# Altium PCB ST25RU3993_RF_MODULE_STENCIL.PcbDoc (part 1 of 2)
Units mil, origin at the board's own origin, x right, y up, seen from the top; angles counter-clockwise.
Board outline 3350 x 3250 mil, 2 copper layers (Top Layer, Bottom Layer), stack 50.4 mil thick; 34 components, 107 nets, 218 pads, 38 vias.
Unrouted connection lines stored in the file: 49.
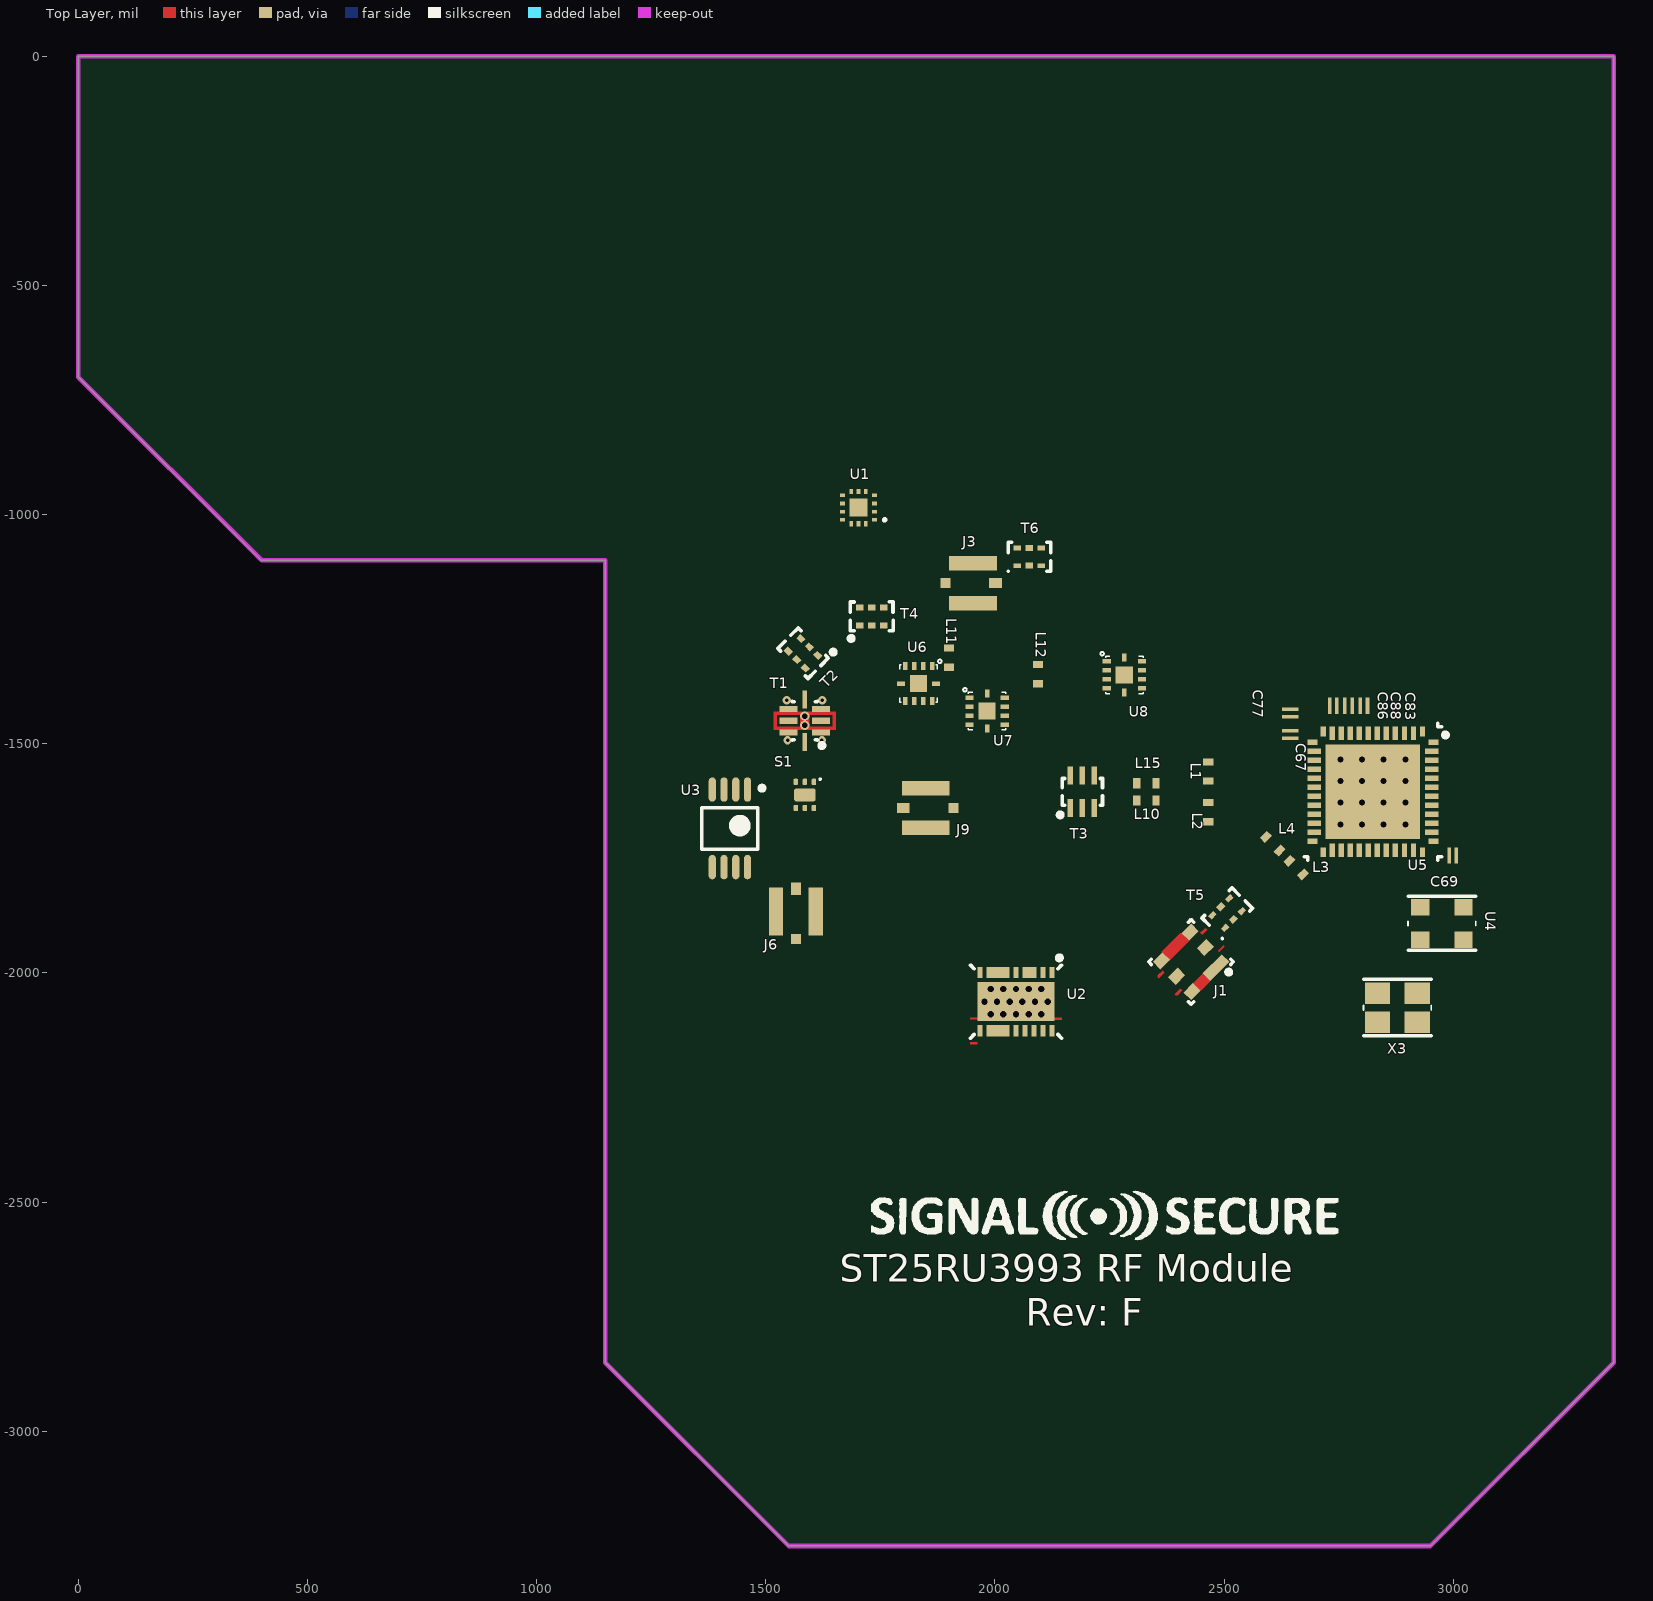
[diagram p0: Top Layer view]
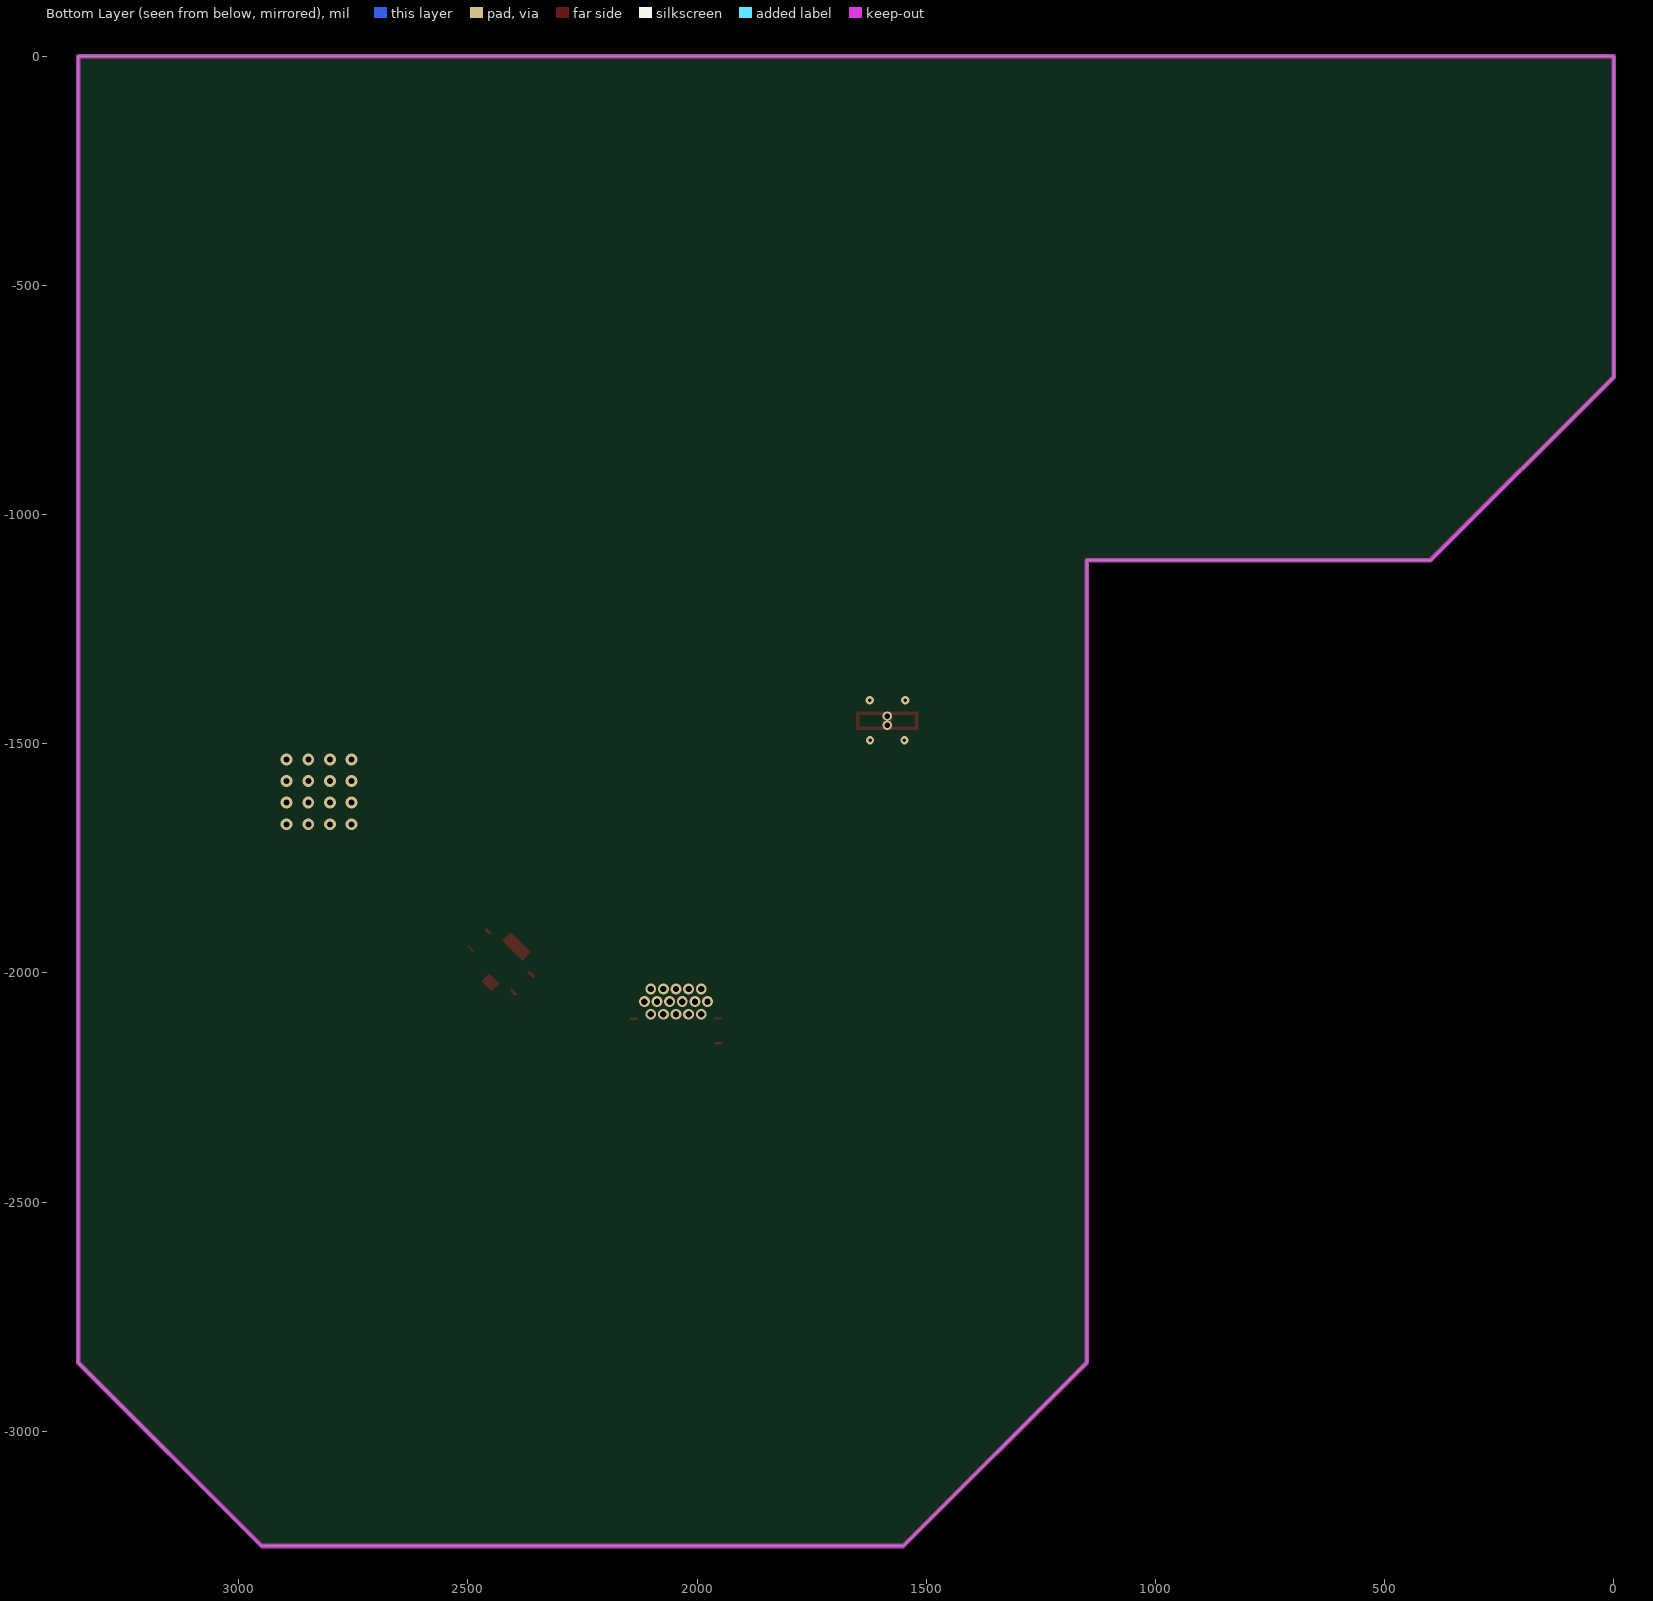
[diagram p1: Bottom Layer view, seen from below]

## Layer stack, top to bottom
Top Solder: solder mask 1, Solder Resist, Dk 4.5
Top Layer: signal copper 1.7
Dielectric2: core 47, FR408HR, Dk 3.69
Bottom Layer: signal copper 1.7
Bottom Solder: solder mask 1, Solder Resist, Dk 4.5

## Board outline
2950,-3250 3350,-2850 3350,0 0,0 0,-700 400,-1100 1150,-1100 1150,-2850 1550,-3250

## Design rules (kind name [scope] priority, off if disabled: settings)
AssemblyTestPointUsage [All] p1 off:
AssemblyTestpoint [All] p1 off: testpointundercomponent=TRUE minsize=40 maxsize=100 preferedsize=60 minholesize=0 maxholesize=40 preferedholesize=32 testpointgrid=1 usegrid=TRUE gridtolerance=0.01 allowsidetop=TRUE allowsidebottom=TRUE
Clearance Clearance_5 [IsTrack vs InComponent('1','2','3','4','5','6','7','8','9','10','11','12','13','14','15','16','17','18','19','20','21','22','23','24','25','26','27','28','29','30','31','32','33','34','35','36','37','38','39','40','41','42','43','44','45','46','47','48','49','50','51','52','53','54','55')] p1: gap=0 ignorepadtopadclearanceinfootprint=TRUE
Clearance [InNetClass('Differential_RF') and IsTrack or InNetClass('Differential_RF') and IsArc or InNetClass('Differential_RF') and IsPad or InNet('PAOUT_N')or InNet('PAOUT_P')or InNet('NetC5_2') or InNet('NetC4_2') or InNet('NetC7_2')or InNet('NetC6_1') vs InNamedPolygon('S')] p2: gap=31.5 ignorepadtopadclearanceinfootprint=FALSE except(0: Arc-Hole Track-Hole SMDPad-Hole THPad-Hole Via-Hole Fill-Hole Poly-Hole Region-Hole Text-Hole)
Clearance Clearance_3 [InNetClass('SE_CPWG') and IsTrack or InNetClass('SE_CPWG') and IsArc or InNetClass('SE_CPWG') and IsPad vs InNamedPolygon('S')] p3: gap=15.75 ignorepadtopadclearanceinfootprint=FALSE except(0: Arc-Hole Track-Hole SMDPad-Hole THPad-Hole Via-Hole Fill-Hole Poly-Hole Region-Hole Text-Hole)
Clearance Clearance_1 [InNet('NetT4_1') vs InNet('CPL_TN')] p4: gap=3.94 ignorepadtopadclearanceinfootprint=FALSE except(0: Arc-Hole Track-Hole SMDPad-Hole THPad-Hole Via-Hole Fill-Hole Poly-Hole Region-Hole Text-Hole)
Clearance Clearance_4 [InComponent('T4') or InComponent('U2') or InComponent('U3')] p5: gap=5 ignorepadtopadclearanceinfootprint=FALSE except(0: Arc-Hole Track-Hole SMDPad-Hole THPad-Hole Via-Hole Fill-Hole Poly-Hole Region-Hole Text-Hole)
Clearance Clearance_2 [All] p6: gap=5 ignorepadtopadclearanceinfootprint=TRUE except(0: Arc-Hole Track-Hole SMDPad-Hole THPad-Hole Via-Hole Fill-Hole Poly-Hole Region-Hole Text-Hole; 7: Via-Poly; 10: Arc-Poly Track-Poly SMDPad-Poly THPad-Poly Fill-Poly Poly-Poly)
ComponentClearance ComponentClearance_2 [InComponent('SHIELD1')] p1: gap=0 collisioncheckmode=3 verticalgap=0 showdistances=FALSE
ComponentClearance [All] p2: gap=10 collisioncheckmode=3 verticalgap=10 showdistances=TRUE
DiffPairsRouting [InNetClass('PAOUT')] p1: maxlimit=5 minlimit=5 mostfreqgap=5 toplayer_minwidth=32.1 toplayer_maxwidth=32.1 toplayer_prefwidth=128.32 bottomlayer_minwidth=32.1 bottomlayer_maxwidth=32.1 bottomlayer_prefwidth=128.32 impedanceprofiledriven=TRUE impedanceprofileid={03FC9658-CDFA-40E1-9851-20E2EF889013} impedanceprofilevalue=50.000000 maxuncoupledlength=500
DiffPairsRouting DiffPairsRouting_RF [InNetClass('Differential_RF')] p2: maxlimit=15 minlimit=15 mostfreqgap=15 toplayer_minwidth=12.08 toplayer_maxwidth=12.08 toplayer_prefwidth=38.44 bottomlayer_minwidth=12.08 bottomlayer_maxwidth=12.08 bottomlayer_prefwidth=38.44 impedanceprofiledriven=TRUE impedanceprofileid={1FACFACD-6859-4A94-B60A-4F717C3D1123} impedanceprofilevalue=100.000000 maxuncoupledlength=0
FabricationTestPointUsage [All] p1 off: valid=0 allowmultiple=FALSE
FabricationTestpoint [All] p1 off: side=3 testpointundercomponent=TRUE minsize=40 maxsize=100 preferedsize=60 minholesize=0 maxholesize=40 preferedholesize=32 testpointgrid=1 allowsidetop=TRUE allowsidebottom=TRUE usegrid=TRUE gridtolerance=0.01
HoleSize FabricationTestpoint_1 [All] p1 off: absolutevalues=TRUE maxlimit=100 minlimit=1 maxpercent=80.000 minpercent=20.000
HoleSize FabricationTestPointUsage_1 [All] p2 off: absolutevalues=TRUE maxlimit=100 minlimit=1 maxpercent=80.000 minpercent=20.000
HoleSize [All] p3: absolutevalues=TRUE maxlimit=393.7 minlimit=5.91 maxpercent=80.000 minpercent=20.000
HoleToHoleClearance [ViaDiameter = 0.3] p1: gap=3.94 allowstackedmicrovias=TRUE
HoleToHoleClearance HoleToHoleClearance_1 [All] p2: gap=7.87 allowstackedmicrovias=TRUE
MatchedLengths [InNet('NetP1_2') or InNet('NetP2_2')] p1: tolerance=393.7 checknetsindiffpair=FALSE checkdiffpairvsdiffpair=TRUE checkxsignals=TRUE checkothers=TRUE
MinimumSolderMaskSliver [All] p1: minsoldermaskwidth=1.77
PlaneClearance [All] p1: clearance=19.68
PlaneConnect [All] p1: planeconnectstyle=Direct reliefexpansion=15.75 reliefentries=4 reliefconductorwidth=5.91 reliefairgap=5.91
PolygonConnect PolygonConnect_1 [InNet('GND')or InNet('MOD_BPLUS')or InNet('VPA')or InNet('VSUP')or InNet('5V') or InNet('NetC45_3') or InNet('NetC49_3')or InNet('VBUS')or InNet('NetP1_1') or InNet('NetC23_1')  or InNet('3V3')  or InNet('NetP1_5') or InNet('6V')] p1: connectstyle=Direct reliefconductorwidth=10 reliefentries=4 polygonreliefangle="90 Angle" airgapwidth=10
PolygonConnect [All] p2: connectstyle=Direct reliefconductorwidth=5.91 reliefentries=4 polygonreliefangle="90 Angle" airgapwidth=10
RoutingCorners [All] p1: cornerstyle=45-Degree minsetback=49.21 maxsetback=49.21
RoutingVias [All] p1: holewidth=7.87 width=23.62 viastyle="Through Hole" minholewidth=7.87 minwidth=7.87 maxholewidth=393.7 maxwidth=787.4
ShortCircuit ShortCircuit_1 [InComponent('B1')] p1: allowed=TRUE
ShortCircuit [All] p2: allowed=FALSE
SilkToSilkClearance [All] p1: silktosilkclearance=2
SilkToSolderMaskClearance [IsPad] p1: minsilkscreentomaskgap=0.2 clearancetoexposedcopper=TRUE
SolderMaskExpansion [All] p1: expansion=2.95 istentingtop=FALSE
Width Width_1 [InNetClass('SE_CPWG')] p1: maxlimit=16.22 minlimit=16.22 preferedwidth=101.52 impedanceprofiledriven=TRUE impedanceprofileid={BA523BF8-DAAF-41FE-A3D9-FB1800768F6D} impedanceprofilevalue=50.000000 minimp=50.000000 maximp=50.000000 favimp=50.000000
Width [All] p2: maxlimit=393.7 minlimit=5 preferedwidth=10 minimp=50.000000 maximp=50.000000 favimp=50.000000
15 further rules are at their usual default settings.

## Classes and differential pairs
net class PAOUT: NetC6_1 NetC7_2 PAOUT_N PAOUT_P
component class System_Overview_HP: H1 Shield2
net class Differential_RF: IN_N IN_P RFO_N RFO_P RX_N RX_P TX_N TX_P
component class "UHF RFID Reader": C67 C69 C77 C83 C86 C88 J9 L1 L2 L3 L4 L10 L15 T3 Title_Block_Antenna6 U4 U5 X3
component class "Power Amplifier": J1 J6 S1 T2 Title_Block_Antenna4 U2 U3
component class "Carrier Cancellation": J3 Title_Block_Antenna7 U6 U7 U8
net class SE_CPWG: LP_Filter_IN LP_Filter_OUT NetANT1_IN NetANT2_IN NetANT3_IN NetANT4_IN NetANT5_IN NetANT6_IN NetC32_1 NetC32_2 NetC37_1 NetC37_2 NetC107_1 NetC107_2 NetC108_1 NetC108_2 NetC109_1 NetC112_1 NetC112_2 NetJ1_IN NetJ1_OUT NetJ3_IN NetJ3_OUT NetL12_2 NetR22_2 NetR23_2 NetR24_2 NetT2_1 PA_OUT
component class "Antenna Switch": Title_Block_Antenna7 U1
differential pair PAOUT: +PAOUT_P -PAOUT_N
differential pair TX: +TX_P -TX_N
differential pair RX: +RX_P -RX_N
differential pair IN: +IN_P -IN_N
differential pair RFO: +RFO_P -RFO_N

## Components (designator, comment, footprint, x,y, rotation, side; value= is the part's Value field where it differs from the comment)
C67 "100nF" C0402-LLL 2644.34,-1479.77 r90 top locked
C69 "100nF" C0402-LLL 2998.67,-1743.55 r0 top locked
C77 "100nF" C0402-LLL 2644,-1432.87 r90 top locked
C83 "100nF" C0402-LLL 2804.77,-1416.78 r0 top locked
C86 "100nF" C0402-LLL 2737.84,-1416.78 r180 top locked
C88 "100nF" C0402-LLL 2771.31,-1416.78 r180 top locked
J1 "COAX JACK" MS-156HF_SAW 2427.8,-1975.83 r135 top locked
J3 "COAX JACK" MS-156HF 1952,-1149.69 r270 top locked
J6 "COAX JACK" MS-156HF 1565.6,-1865.6 r0 top locked
J9 "COAX JACK" MS-156HF 1849.06,-1640.2 r90 top locked
L1 "30nH" L0402-RF 2465.2,-1560.48 r90 top locked
L2 "30nH" L0402-RF 2465.2,-1649.06 r90 top locked
L3 "30nH" L0402-RF 2657.13,-1770.13 r135 top locked
L4 "30nH" L0402-RF 2605.95,-1717.96 r135 top locked
L10 "3n6H" L0402-RF 2330.36,-1623.47 r0 top locked
L11 "6n8H" L0402-RF 1899.26,-1312.28 r270 top locked
L12 "6n2H" L0402-RF 2094.14,-1348.06 r90 top locked
L15 "3n6H" L0402-RF 2330.36,-1586.07 r180 top locked
S1 "SP2T" SKY13431-374LF 1585.28,-1611.66 r270 top locked
T1 "LOWPASS FILTER" JTI-0900LP15B0063 1585,-1449.74 r90 top locked
T2 "20 dB Dir Coupler" DC0710J5010AHF 1581.35,-1302.61 r225 top locked
T3 "Balun" JTI-0900BL15C050 2190.6,-1604.77 r90 top locked
T4 "10dB Dir Coupler" DC0710J5010AHF 1731,-1222 r90 top locked
T5 "BD0810J50100A00" BD0810J50100AHF 2506.54,-1869.54 r135 top locked
T6 "BD0810J50100A00" BD0810J50100AHF 2075,-1092 r90 top locked
U1 "SKY13416-485LF" SKY13416485LF 1702.25,-984.76 r180 top locked
U2 "TQP9107" TQP9107 2045.91,-2062.45 r0 top locked
U3 "Log Detect" MAX4003 1421.74,-1684.5 r270 top locked
U4 "TCXO 20.000MHZ" "3.2 X 2.5 MM SMD" 2975.05,-1892.15 r180 top locked
U5 "ST25RU3993" ST25RU3993_QFN48_0.5mm_pitch 2824.46,-1604.77 r270 top locked
U6 "PE64906B-Z" PE62304 1833.32,-1368.55 r270 top locked
U7 "PE64906B-Z" PE62304 1982.92,-1428.59 r0 top locked
U8 "PE64906B-Z" PE62304 2282.13,-1349.85 r0 top locked
X3 "20 MHZ" NX3225SA 2878,-2076 r180 top locked

## Footprints (in the part's own frame and the unit in brackets; to place one, negate y for a bottom-side part, rotate by r counter-clockwise, add the part's x,y. Pads: shape width x height; smd on the part's side, far side on the other; paste and mask are expansions set on the pad)
"3.2 X 2.5 MM SMD" [mm] "Temperature Compensated Crystal Oscillator"
  rect 1x0.9 smd paste+0 mask+0: 1(-1.2,-0.9) 2(1.2,-0.9) 3(1.2,0.9) 4(-1.2,0.9)
  silkscreen extent -1.88,-1.51 1.88,1.48, body extent -1.65,-1.33 1.65,1.3, height 0.7
BD0810J50100AHF [mm] "RF Balun 800MHz ~ 1GHz 50 / 100 Ohm 0805"
  rect 0.27x0.41 smd mask+0.04: 1(-0.495,0.66) 3(-0.495,-0.66) 4(0.495,-0.66) 6(0.495,0.66)
  rect 0.33x0.41 smd mask+0.04: 2(-0.495,0) 5(0.495,0)
  silkscreen extent -0.8,-1.19 0.8,1.18, body extent -0.65,-1.03 0.65,1.03, height 0.86
C0402-LLL [mm]
  rect 0.2x0.9 smd paste+0 mask+0: 1(-0.2,0) 2(0.2,0)
  body extent -0.26,-0.51 0.25,0.51, height 0.31
DC0710J5010AHF [mm] "Directional Coupler"
  rect 0.33x0.41 smd mask+0.04: 1(-0.495,0.66) 2(-0.495,0) 3(-0.495,-0.66) 4(0.495,-0.66) 5(0.495,0) 6(0.495,0.66)
  silkscreen extent -1.35,-1.19 0.8,1.26, body extent -0.65,-1.03 0.65,1.03, height 0.86
JTI-0900BL15C050 [mm] "900 MHz Balun 1:1"
  rect 1x0.3 smd mask+0.07: 1(-0.9,0.66) 2(-0.9,0) 3(-0.9,-0.65) 4(0.9,-0.65) 5(0.9,0) 6(0.9,0.66)
  silkscreen extent -1.4,-1.12 0.74,1.35, body extent -0.64,-1.02 0.65,1.02, height 0.86
JTI-0900LP15B0063 [mm] "900 MHz Low Pass Filter"
  rect 0.35x1 smd mask+0.05: 1(-0.65,-0.9) 2(0,-0.9) 3(0.65,-0.9) 5(0.65,0.9) 6(0,0.9) 7(-0.65,0.9)
  rect 1x0.27 smd mask+0.05: 4(1.175,0) 8(-1.175,0)
  Top Layer region: -0.511,-0.399 -0.511,1.4 -0.325,1.4 -0.325,0.25 0,0.25 0,-0.25 -0.325,-0.25 -0.325,-1.4 -0.511,-1.4
  Top Layer region: 0.51,0.399 0.51,-1.4 0.325,-1.4 0.325,-0.25 0,-0.25 0,0.25 0.325,0.25 0.325,1.4 0.51,1.4
  Top Layer region: -0.325,1.4 -0.325,1.55 0.325,1.55 0.325,1.4 0.51,1.4 0.51,1.725 -0.511,1.725 -0.511,1.4
  Top Layer region: 0.325,-1.4 0.325,-1.55 -0.325,-1.55 -0.325,-1.4 -0.51,-1.4 -0.51,-1.725 0.511,-1.725 0.511,-1.4
  silkscreen extent -1.5,-1.07 1.08,0.7, body extent -1.08,-0.7 1.08,0.7, height 0.96
L0402-RF [mil]
  rect 15.75x22 smd paste+0 mask+0: 1(-21,0) 2(21,0)
  body extent -22,-11 22,11, height 12
MAX4003 [mm] "µmax"
  oval 1.35x0.4 smd: 1(-2.15,0.975) 2(-2.15,0.325) 3(-2.15,-0.325) 4(-2.15,-0.975) 5(2.15,-0.975) 6(2.15,-0.325) 7(2.15,0.325) 8(2.15,0.975)
  silkscreen extent -2.35,-1.55 1.15,1.9, body extent -1.55,-1.55 1.55,1.55, height 1.1
MS-156HF [mm] "Subminiature Coaxial Switch"
  rect 0.8x2.65 smd paste+0 mask+0.051: G1(1.1,0) G2(-1.1,0)
  rect 0.55x0.55 smd paste-0.3 mask+0.051: IN(0,-1.525)
  rect 0.55x0.7 smd paste-0.3 mask+0.051: OUT(0,1.25)
  body extent -1.36,-1.35 1.34,1.35, height 1.56
MS-156HF_SAW [mm] "Coax swappable with SAW"
  rect 0.6x1.5 smd paste-0.065 mask+0.1: G1(-1.2,-0.75)
  rect 0.6x0.75 smd paste-0.065 mask+0.1: G1(-1.2,1.125) G2(1.2,-1.125) G2(1.2,1.125) IN(0,-1.125) OUT(0,1.125)
  silkscreen extent -2,-1.66 1.66,1.66, body extent -1.35,-1.35 1.35,1.35, height 1.56
NX3225SA [mm] "20 MHz Crystal Oscillator"
  rect 1.4x1.2 smd paste+0 mask+0: 1(-1.1,-0.8) 2(1.1,-0.8) 3(1.1,0.8) 4(-1.1,0.8)
  silkscreen extent -1.88,-1.58 1.88,1.55, body extent -1.65,-1.3 1.65,1.3, height 1.1
PE62304 [mm] "Digitally Tunable Capacitor for GSM/WCDMA"
  rect 0.45x0.25 smd mask+0.05: 1(-0.975,0.75) 2(-0.975,0.25) 3(-0.975,-0.25) 4(-0.975,-0.75) 6(0.975,-0.75) 7(0.975,-0.25) 8(0.975,0.25) 9(0.975,0.75)
  rect 0.25x0.45 smd mask+0.05: 5(0,-0.975) 10(0,0.975)
  rect 0.95x0.95 smd mask+0.05: 10(0,0)
  silkscreen extent -1.33,-1.04 1.04,1.28, body extent -1,-1.07 1,0.92, height 0.6
SKY13431-374LF [mm] "6 Pin DFN"
  rrect50% 0.35x0.25 smd mask+0.05: 1(-0.725,0.5) 2(-0.725,0) 3(-0.725,-0.5) 4(0.725,-0.5) 5(0.725,0) 6(0.725,0.5)
  rrect30% 0.7x1.2 smd mask+0.05: 7(0,0)
  silkscreen extent -0.92,0.8 -0.83,0.9, body extent -0.75,-0.75 0.75,0.75, height 0.5
SKY13416485LF [mm]
  rect 0.28x0.2 smd: 1(-0.895,0.675) 2(-0.895,0.225) 3(-0.895,-0.225) 4(-0.895,-0.675) 8(0.895,-0.675) 9(0.895,-0.225) 10(0.895,0.225) 11(0.895,0.675)
  rect 0.2x0.28 smd: 5(-0.4,-0.895) 6(0,-0.895) 7(0.4,-0.895) 12(0.4,0.895) 13(0,0.895) 14(-0.4,0.895)
  rect 1x1 smd: 15(0,0)
  silkscreen extent -1.5,0.63 -1.4,0.72, body extent -1.01,-1.01 1.01,1.01, height 0.7
ST25RU3993_QFN48_0.5mm_pitch [mm] "QFN, 48-Leads, Body 7,0x7,0mm (max), Pitch 0,50mm, IPC Medium Density"
  rect 0.55x0.3 smd paste+0 mask+0.05: 1(-3.35,2.75) 12(-3.35,-2.75) 25(3.35,-2.75) 36(3.35,2.75)
  rect 0.75x0.3 smd mask+0.05: 2(-3.25,2.25)
  rect 0.75x0.3 smd paste+0 mask+0.05: 3(-3.25,1.75) 4(-3.25,1.25) 5(-3.25,0.75) 6(-3.25,0.25) 7(-3.25,-0.25) 8(-3.25,-0.75) 9(-3.25,-1.25) 10(-3.25,-1.75) 11(-3.25,-2.25) 26(3.25,-2.25) 27(3.25,-1.75) 28(3.25,-1.25) 29(3.25,-0.75) 30(3.25,-0.25) 31(3.25,0.25) 32(3.25,0.75) 33(3.25,1.25) 34(3.25,1.75) 35(3.25,2.25)
  rect 0.3x0.55 smd paste+0 mask+0.05: 13(-2.75,-3.35) 24(2.75,-3.35) 37(2.75,3.35) 48(-2.75,3.35)
  rect 0.3x0.75 smd paste+0 mask+0.05: 14(-2.25,-3.25) 15(-1.75,-3.25) 16(-1.25,-3.25) 17(-0.75,-3.25) 18(-0.25,-3.25) 19(0.25,-3.25) 20(0.75,-3.25) 21(1.25,-3.25) 22(1.75,-3.25) 23(2.25,-3.25) 38(2.25,3.25) 39(1.75,3.25) 40(1.25,3.25) 41(0.75,3.25) 42(0.25,3.25) 43(-0.25,3.25) 44(-0.75,3.25) 45(-1.25,3.25) 46(-1.75,3.25) 47(-2.25,3.25)
  rect 5.24x5.24 smd mask+0.07: 49(0,0)
  silkscreen extent -3.8,-3.8 3.8,4.15, body extent -3.5,-3.5 3.5,3.5, height 1
TQP9107 [mm] "699 – 960 MHz 2-stage Power Amplifier"
  rect 0.27x0.62 smd mask+0.05: 1(2,1.62) 2(1.5,1.62) 4(0,1.62) 6(-2,1.62) 7(-2,-1.62) 9(0,-1.62) 10(0.5,-1.62) 11(1,-1.62) 12(1.5,-1.62) 13(2,-1.62)
  rect 0.77x0.62 smd mask+0.05: 3(0.75,1.62)
  rect 1.27x0.62 smd mask+0.05: 5(-1,1.62) 8(-1,-1.62)
  rect 4.28x2.16 smd mask+0.05: 14(0,0)
  silkscreen extent -2.53,-2.03 2.53,2.55, body extent -2.25,-1.75 2.25,1.75, height 0.85

## Part data
C67 C69 C77 C83 C86 C88: library part LLL153C80J104ME01E, "CAP CER 0.1UF 6.3V X6S 0204", Capacitance @ Frequency=-, Manufacturer="Murata Electronics North America", Operating Temperature="-55°C ~ 105°C", Package / Case="0204 (0510 Metric)", Power - Peak Pulse=500W, Power Line Protection=Yes, Supplier Device Package=8-SO, Supplier Part Number 1=490-4310-1-ND, Temperature Coefficient=X6S, Tolerance=±20%, Voltage - Breakdown (Min)=6V, Voltage - Rated=6.3V, Voltage - Reverse Standoff (Typ)=5.25V, Applications="Bypass, Decoupling", Category=Capacitors, ComponentLink1Description=http://www.murata.com/~/media/webrenewal/support/library/catalog/products/capacitor/mlcc/c02e.ashx, ComponentLink1URL=http://www.murata.com/~/media/webrenewal/support/library/catalog/products/capacitor/mlcc/c02e.ashx, ComponentLink2Description=http://www.st.com/content/ccc/resource/technical/document/datasheet/3e/ec/b2/54/b2/76/47/90/CD00001361.pdf/files/CD00001361.pdf/jcr:content/translations/en.CD00001361.pdf, ComponentLink2URL=http://www.st.com/content/ccc/resource/technical/document/datasheet/3e/ec/b2/54/b2/76/47/90/CD00001361.pdf/files/CD00001361.pdf/jcr:content/translations/en.CD00001361.pdf, Current - Peak Pulse (10/1000µs)=-, Exact Component Match=no, Features="Low ESL", Height - Seated (Max)=-, Lead Spacing=-, Lead Style=-, Manufacturer Part Number=LLL153C80J104ME01E, Mounting Type="Surface Mount, MLCC", Packaging="Cut Tape (CT)", Part Status=Active, Pricing 1="1=0.19, 10=0.133, 100=0.0671, 500=0.0459, 1000=0.04061, 2500=0.03884, 5000=0.03531 (EUR)", Pricing 2="1=0.97, 10=0.867, 100=0.6756, 500=0.55814, 1000=0.44063 (EUR)", Ratings=-, RoHs="RoHS Compliant", Size / Dimension="0.020\" L x 0.039\" W (0.50mm x 1.00mm)", Stock=1389, Supplier 1=Digi-Key, Supplier 2=Digi-Key, Supplier Part Number 2=497-3281-1-ND, Thickness (Max)="0.014\" (0.35mm)", Type="Steering (Rail to Rail)", Voltage - Clamping (Max) @ Ipp=-
J1: library part MS-156HF_SAW, "CONN COAX JACK STR 50 OHM SMD", Capacitance=2.2µF, Current=4A, DC Resistance (DCR)="1.25 Ohm Max", DC Resistance (DCR) (Max)="10 mOhm", Dielectric Material="Polyamide (PA), Nylon 6T", Frequency="700MHz ~ 1GHz", Frequency - Max=6GHz, Housing Color=Gold, Manufacturer="Hirose Electric Co Ltd", Manufacturer 2=Anaren, Manufacturer Part Number=MS-156HF(01), Manufacturer Part Number 2=DC0710J5010AHF, Operating Temperature="-40°C ~ 85°C", Package / Case="0805 (2012 Metric)", Power - Max=2W, Ratings=-, Supplier Device Package=0805, Supplier Part Number 1=H11669-ND, Tolerance=±20%, Voltage - Rated=10V, Applications="General Purpose", Body Finish=Gold, Body Material="Phosphor Bronze", Cable Group=-, Category="Connectors, Interconnects", Center Contact Material="Beryllium Copper", Center Contact Plating=Gold, ComponentLink1Description=https://www.hirose.com/product/en/download_file/key_name/MS-156HF/category/Catalog/doc_file_id/49714/?file_category_id=4&item_id=394&is_series=1, ComponentLink1URL=https://www.hirose.com/product/en/download_file/key_name/MS-156HF/category/Catalog/doc_file_id/49714/?file_category_id=4&item_id=394&is_series=1, ComponentLink2Description=https://www.anaren.com/sites/default/files/Part-Datasheets/DC0710J5010AHF_Datasheet_RevA.pdf, ComponentLink2URL=https://www.anaren.com/sites/default/files/Part-Datasheets/DC0710J5010AHF_Datasheet_RevA.pdf, ComponentLink3Description=http://search.murata.co.jp/Ceramy/image/img/A01X/G101/ENG/NFM18PC225B1A3-01.pdf, ComponentLink3URL=http://search.murata.co.jp/Ceramy/image/img/A01X/G101/ENG/NFM18PC225B1A3-01.pdf, ComponentLink4Description=http://search.murata.co.jp/Ceramy/image/img/P02/JELF243B-0010.pdf, ComponentLink4URL=http://search.murata.co.jp/Ceramy/image/img/P02/JELF243B-0010.pdf, Connector Style="Coaxial Switch - 4mm Plug Dia", Connector Type="Receptacle, Female Socket", Contact Termination=Solder, Coupler Type=Standard, Coupling Factor=10.9dB, Exact Component Match=no, Fastening Type=Snap-On, Features="Internal Switch", Height (Max)="0.028\" (0.70mm)", Height - Seated (Max)="0.022\" (0.55mm)", Impedance="50 Ohm", Ingress Protection=-, Insertion Loss=0.21dB, Isolation=-, Manufacturer 1="Hirose Electric Co Ltd", Manufacturer Part Number 1=MS-156HF(01), Material - Core=Air, Mounting Type="Surface Mount", Packaging=Bulk, Part Status=Active, Pricing="1=0.08, 10=0.064, 100=0.0424, 500=0.0354, 1000=0.02973, 2500=0.02548 (EUR)", Pricing 1="1=0.84, 10=0.735, 25=0.6912, 50=0.6626, 100=0.6337, 250=0.57612, 500=0.51852, 1000=0.4609, 2500=0.41769 (EUR)", Pricing 2="1=0.82, 10=0.735, 25=0.648, 100=0.5833, 250=0.50772, 500=0.4537 (EUR)", Pricing 3="1=0.25, 10=0.237, 25=0.2256, 50=0.2184, 100=0.2112, 250=0.20028, 500=0.1675, 1000=0.12999 (EUR)", Return Loss=17.5dB, RoHs="RoHS Compliant", Shielding=Unshielded, Shield Termination=Solder, Size / Dimension="0.063\" L x 0.031\" W (1.60mm x 0.80mm)", Stock=3361, Stock 1=10, Stock 2=8788, Supplier 1=Digi-Key, Supplier 2=Digi-Key, Supplier 3=Digi-Key, Supplier 4=Digi-Key, Supplier Part Number 2=1173-1084-1-ND, Supplier Part Number 3=490-6972-1-ND, Supplier Part Number 4=490-15137-1-ND, Temperature Coefficient=-, Thread Size=-, Type=Multilayer, Voltage Rating=-
J3 J6 J9: library part MS-156HF, "CONN COAX JACK STR 50 OHM SMD", Dielectric Material="Polyamide (PA), Nylon 6T", Frequency="700MHz ~ 1GHz", Frequency - Max=6GHz, Housing Color=Gold, Manufacturer="Hirose Electric Co Ltd", Manufacturer 2=Anaren, Manufacturer Part Number=MS-156HF(01), Manufacturer Part Number 2=DC0710J5010AHF, Operating Temperature="-40°C ~ 85°C", Package / Case="0805 (2012 Metric)", Power - Max=2W, Supplier Device Package=0805, Supplier Part Number 1=H11669-ND, Voltage Rating=-, Applications="General Purpose", Body Finish=Gold, Body Material="Phosphor Bronze", Cable Group=-, Category="Connectors, Interconnects", Center Contact Material="Beryllium Copper", Center Contact Plating=Gold, ComponentLink1Description=https://www.hirose.com/product/en/download_file/key_name/MS-156HF/category/Catalog/doc_file_id/49714/?file_category_id=4&item_id=394&is_series=1, ComponentLink1URL=https://www.hirose.com/product/en/download_file/key_name/MS-156HF/category/Catalog/doc_file_id/49714/?file_category_id=4&item_id=394&is_series=1, ComponentLink2Description=https://www.anaren.com/sites/default/files/Part-Datasheets/DC0710J5010AHF_Datasheet_RevA.pdf, ComponentLink2URL=https://www.anaren.com/sites/default/files/Part-Datasheets/DC0710J5010AHF_Datasheet_RevA.pdf, Connector Style="Coaxial Switch - 4mm Plug Dia", Connector Type="Receptacle, Female Socket", Contact Termination=Solder, Coupler Type=Standard, Coupling Factor=10.9dB, Exact Component Match=no, Fastening Type=Snap-On, Features="Internal Switch", Impedance="50 Ohm", Ingress Protection=-, Insertion Loss=0.21dB, Isolation=-, Manufacturer 1="Hirose Electric Co Ltd", Manufacturer Part Number 1=MS-156HF(01), Mounting Type="Surface Mount", Packaging=Bulk, Part Status=Active, Pricing 1="1=0.84, 10=0.735, 25=0.6912, 50=0.6626, 100=0.6337, 250=0.57612, 500=0.51852, 1000=0.4609, 2500=0.41769 (EUR)", Pricing 2="1=0.82, 10=0.735, 25=0.648, 100=0.5833, 250=0.50772, 500=0.4537 (EUR)", Return Loss=17.5dB, RoHs="RoHS Compliant", Shield Termination=Solder, Stock 1=10, Stock 2=8788, Supplier 1=Digi-Key, Supplier 2=Digi-Key, Supplier Part Number 2=1173-1084-1-ND
L1 L2 L3 L4: library part LQW15AN30NG00D, "FIXED IND 30NH 270MA 580 MOHM", Current - Saturation=-, Current Rating=270mA, DC Resistance (DCR)="580 mOhm Max", Frequency - Self Resonant=3.3GHz, Frequency - Test=100MHz, Manufacturer="Murata Electronics North America", Operating Temperature="-55°C ~ 125°C", Package / Case="0402 (1005 Metric)", Q @ Freq="25 @ 250MHz", Supplier Part Number 1=490-6802-1-ND, Tolerance=±2%, Category="Inductors, Coils, Chokes", ComponentLink1Description=http://search.murata.co.jp/Ceramy/image/img/PDF/ENG/L0075S0080LQW15A_00.pdf, ComponentLink1URL=http://search.murata.co.jp/Ceramy/image/img/PDF/ENG/L0075S0080LQW15A_00.pdf, Height - Seated (Max)="0.024\" (0.60mm)", Inductance=30nH, Manufacturer Part Number=LQW15AN30NG00D, Material - Core=Non-Magnetic, Mounting Type="Surface Mount", Packaging="Cut Tape (CT)", Part Status=Active, Pricing 1="1=0.17, 10=0.158, 25=0.1424, 50=0.1236, 100=0.1109, 250=0.10292, 500=0.09502, 750=0.09027, 1000=0.08235 (EUR)", Ratings=-, RoHs="RoHS Compliant", Shielding=Unshielded, Size / Dimension="0.039\" L x 0.020\" W (1.00mm x 0.50mm)", Stock 1=10167, Supplier 1=Digi-Key, Supplier Device Package="0402 (1005 Metric)", Type=Wirewound
  L1 L2: Exact Component Match=yes
  L3 L4: Exact Component Match=no
L10 L15: library part LQW15AN3N6C10D, "FIXED IND 3.6NH 900MA 40 MOHM", Current - Saturation=-, Current Rating=900mA, DC Resistance (DCR)="40 mOhm Max", Frequency - Self Resonant=9.5GHz, Frequency - Test=100MHz, Inductance=3.6nH, Manufacturer="Murata Electronics North America", Operating Temperature="-55°C ~ 125°C", Package / Case="0402 (1005 Metric)", Q @ Freq="30 @ 250MHz", Supplier Part Number 1=490-6811-1-ND, Tolerance=±0.2nH, Category="Inductors, Coils, Chokes", ComponentLink1Description=http://search.murata.co.jp/Ceramy/image/img/PDF/ENG/L0075S0080LQW15A_10.pdf, ComponentLink1URL=http://search.murata.co.jp/Ceramy/image/img/PDF/ENG/L0075S0080LQW15A_10.pdf, Exact Component Match=yes, Height - Seated (Max)="0.024\" (0.60mm)", Manufacturer Part Number=LQW15AN3N6C10D, Material - Core=Non-Magnetic, Mounting Type="Surface Mount", Packaging="Cut Tape (CT)", Part Status=Active, Pricing 1="1=0.19, 10=0.173, 25=0.1556, 50=0.1348, 100=0.1209, 250=0.11228, 500=0.10366, 750=0.09848, 1000=0.08984 (EUR)", Ratings=-, RoHs="RoHS Compliant", Shielding=Unshielded, Size / Dimension="0.039\" L x 0.020\" W (1.00mm x 0.50mm)", Stock 1=13387, Supplier 1=Digi-Key, Supplier Device Package="0402 (1005 Metric)", Type=Wirewound
L11: library part LQW15AN6N8G00D, "FIXED IND 6.8NH 700MA 90 MOHM", DC Resistance (DCR)="90 mOhm Max", Manufacturer="Murata Electronics North America", Operating Temperature="-55°C ~ 125°C", Package / Case=Nonstandard, Q @ Freq="25 @ 250MHz", Ratings=-, Supplier Device Package="0402 (1005 Metric)", Supplier Part Number 1=490-6840-1-ND, Tolerance=±2%, Category="Inductors, Coils, Chokes", ComponentLink1Description=http://search.murata.co.jp/Ceramy/image/img/P02/JELF243A-0050.pdf, ComponentLink1URL=http://search.murata.co.jp/Ceramy/image/img/P02/JELF243A-0050.pdf, Exact Component Match=yes, Height - Seated (Max)="0.024\" (0.60mm)", Manufacturer Part Number=LQW15AN6N8G00D, Material - Core=Non-Magnetic, Mounting Type="Surface Mount", Packaging="Cut Tape (CT)", Part Status=Active, Pricing 1="1=0.16, 10=0.145, 100=0.0967, 500=0.08054, 1000=0.06765, 2500=0.05798 (EUR)", RoHs="RoHS Compliant", Shielding=Unshielded, Size / Dimension="0.039\" L x 0.020\" W (1.00mm x 0.50mm)", Stock=89299, Supplier 1=Digi-Key, Type=Wirewound
L12: library part LQW15AN5N6C10D, "Inductor RF Chip Wirewound 6.2nH 0.2nH 100MHz 25Q-Factor 700mA 90mOhm DCR 0402 T/R", Case/Package=0402, Case Code (Metric)=1005, Current=540mA, Current Rating=700mA, DC Resistance (DCR)=90mR, Inductance=6.2nH, Manufacturer=Murata, Manufacturer Part Number=LQW15AN6N2C00D, Max Operating Temperature=125°C, Min Operating Temperature=-55°C, Package Quantity=10000, Self Resonant Frequency=8GHz, Supplier Part Number 1=490-6839-1-ND, Test Frequency=100MHz, Tolerance=3%, Case Code (Imperial)=0402, ComponentLink1Description=https://datasheet.ciiva.com/11799/0900766b8090d800-11799065.pdf?src-supplier=RSComponents, ComponentLink1URL=https://datasheet.ciiva.com/11799/0900766b8090d800-11799065.pdf?src-supplier=RSComponents, ComponentLink2Description=https://datasheet.ciiva.com/4977/product-4977157.pdf?src-supplier=Mouser, ComponentLink2URL=https://datasheet.ciiva.com/4977/product-4977157.pdf?src-supplier=Mouser, ComponentLink3Description=https://datasheet.ciiva.com/16207/l0075s0080lqw15a-00-16207917.pdf?src-supplier=Future+Electronics, ComponentLink3URL=https://datasheet.ciiva.com/16207/l0075s0080lqw15a-00-16207917.pdf?src-supplier=Future+Electronics, Composition=Wirewound, Core Material=Non-Magnetic,Air,Ferrite, DC Current=700mA, Depth=0.7mm, Height=0.5mm, Height - Seated (Max)=0.024inch, Lead Free="Lead Free", Length=1mm, Max DC Current=700mA, Military Standard=Not, Mount="Surface Mount", Number of Pins=2, Packaging="Tape and Reel", Q Factor=25, Radiation Hardening=No, REACH SVHC="No SVHC", RoHs=Yes, Shielding=Unshielded, Stock 1=20182, Supplier 1=Digi-Key, Termination=SMD/SMT, Weight=2.8E-05oz, Width=0.02inch
S1: library part SKY13431-374LF, "IC SWITCH SP2T", Frequency - Lower=500MHz, Insertion Loss @ Frequency="0.8dB @ 5.8GHz", Isolation @ Frequency="20dB @ 5.8GHz (typ)", Manufacturer="Skyworks Solutions Inc.", Operating Temperature="-40°C ~ 85°C", Package / Case="6-XFDFN Exposed Pad", Supplier Device Package="6-DFN (1.5x1.5)", Supplier Part Number 1=863-1651-1-ND, Voltage - Supply="2.5 V ~ 5 V", Category="RF/IF and RFID", Circuit=SPDT, ComponentLink1Description=http://www.skyworksinc.com/uploads/documents/SKY13431_374LF_201649C.pdf, ComponentLink1URL=http://www.skyworksinc.com/uploads/documents/SKY13431_374LF_201649C.pdf, Exact Component Match=no, Features=-, IIP3="57dBm (typ)", Impedance="50 Ohm", Manufacturer Part Number=SKY13431-374LF, P1dB=36dBm, Packaging="Cut Tape (CT)", Part Status=Active, Pricing="1=1.28, 10=1.144, 100=0.8921, 500=0.73694, 1000=0.5818 (EUR)", RF Type="WiMax, WLAN", RoHs="RoHS Compliant", Stock=3887, Supplier 1=Digi-Key, Topology=-
T1: library part 0900LP15B0063, "FILTER LOWPASS 863-960MHZ", Manufacturer="Johanson Technology Inc.", Manufacturer Part Number=0900LP15B0063E, Supplier Part Number 1=712-1635-1-ND, Category=Filters, ComponentLink1Description=https://www.johansontechnology.com/datasheets/low-pass-filters/0900LP15B0063.pdf, ComponentLink1URL=https://www.johansontechnology.com/datasheets/low-pass-filters/0900LP15B0063.pdf, Exact Component Match=no, Part Status=Active, Pricing="1=0.44, 10=0.404, 25=0.3852, 50=0.373, 100=0.3605, 250=0.34176, 500=0.28586, 1000=0.22184 (EUR)", RoHs="RoHS Compliant", Stock=11994, Supplier 1=Digi-Key
T2: library part DC0710J5020AHF, "COUPLER 20DB 700-1000MHZ 0805", Case/Package=0805, Case Code (Metric)=2012, Frequency=700MHz, Manufacturer=Anaren, Max Operating Temperature=85°C, Max Power Dissipation=2W, Min Operating Temperature=-55°C, Package Quantity=4000, Supplier Part Number 1=1173-1085-1-ND, Case Code (Imperial)=0805, ComponentLink1Description=https://datasheet.ciiva.com/2794/dc0710j5020ahf-data20sheet-revd-2794214.pdf?src-supplier=Digi-Key, ComponentLink1URL=https://datasheet.ciiva.com/2794/dc0710j5020ahf-data20sheet-revd-2794214.pdf?src-supplier=Digi-Key, ComponentLink2Description=https://datasheet.ciiva.com/4548/dc0710j5020ahf-data20sheet-revd-26973-4548407.pdf?src-supplier=Mouser, ComponentLink2URL=https://datasheet.ciiva.com/4548/dc0710j5020ahf-data20sheet-revd-26973-4548407.pdf?src-supplier=Mouser, ComponentLink3Description=https://datasheet.ciiva.com/2794/dc0710j5020ahf-datasheet-revd-2794215.pdf?src-supplier=Digi-Key, ComponentLink3URL=https://datasheet.ciiva.com/2794/dc0710j5020ahf-datasheet-revd-2794215.pdf?src-supplier=Digi-Key, ComponentLink4Description=https://datasheet.ciiva.com/15213/getdatasheetpartid-559400-15213447.pdf?src-supplier=Verical, ComponentLink4URL=https://datasheet.ciiva.com/15213/getdatasheetpartid-559400-15213447.pdf?src-supplier=Verical, ComponentLink5Description=https://datasheet.ciiva.com/2794/dc0710j5020ahf-datasheet-revd-2794216.pdf?src-supplier=Digi-Key, ComponentLink5URL=https://datasheet.ciiva.com/2794/dc0710j5020ahf-datasheet-revd-2794216.pdf?src-supplier=Digi-Key, Contact Plating=Gold, Insertion Loss=0.22dB, Manufacturer Part Number=DC0710J5020AHF, Mount="Surface Mount", Number of Pins=6, Packaging="Tape and Reel", Return Loss=21.41dB, RoHs=Yes, Stock 1=12905, Supplier 1=Digi-Key, Termination=SMD/SMT
T3: library part "1:1 BALUN 900MHZ - 0900BL15C050", "1:1 BALUN- 900MHZ 50/50 Ohm", Frequency Range="800 ~ 1000MHz", Manufacturer="Johanson Technology Inc", Manufacturer Part Number=0900BL15C050E, Package / Case="0805 (2012 Metric)", Supplier Part Number 1=712-1022-1-ND, Category="RF/IF and RFID", Component_Description="BALUN GSM/DCS/PCS/CDMA 900MHZ", ComponentLink1Description=http://www.johansontechnology.com/images/stories/ip/baluns/JTI_Balun-0900BL15C050_2005-06.pdf, ComponentLink1URL=http://www.johansontechnology.com/images/stories/ip/baluns/JTI_Balun-0900BL15C050_2005-06.pdf, Exact Component Match=no, Impedance - Unbalanced/Balanced="50 / 50 Ohm", Insertion Loss (Max)=1.2dB, Mounting Type="Surface Mount", Packaging="Cut Tape (CT)", Phase Difference="180° ±10", Pricing 1="1=0.8, 10=0.672, 25=0.5584, 100=0.4568, 250=0.39336, 500=0.36796, 1000=0.29184 (EUR)", Return Loss (Min)=9.5dB, RoHs="RoHS Compliant", Stock 1=0, Supplier 1=Digi-Key
T4: library part DC0710J5010AHF, "Directional Coupler", Frequency="700MHz ~ 1GHz", Manufacturer=Anaren, Package / Case="0805 (2012 Metric)", Power - Max=2W, Supplier Device Package=0805, Supplier Part Number 1=1173-1084-1-ND, Applications="General Purpose", Category="RF/IF and RFID", ComponentLink1Description=https://cdn.anaren.com/product-documents/Xinger/DirectionalCouplers/DC0710J5010AHF/DC0710J5010AHF_DataSheet(Rev_B).pdf, ComponentLink1URL=https://cdn.anaren.com/product-documents/Xinger/DirectionalCouplers/DC0710J5010AHF/DC0710J5010AHF_DataSheet(Rev_B).pdf, Coupler Type=Standard, Coupling Factor=10.9dB, Exact Component Match=no, Insertion Loss=0.21dB, Isolation=-, Manufacturer Part Number=DC0710J5010AHF, Packaging="Cut Tape (CT)", Part Status=Active, Pricing="1=0.74, 10=0.654, 25=0.5904, 100=0.5167, 250=0.45344, 500=0.4007 (EUR)", Return Loss=17.5dB, RoHs="RoHS Compliant", Stock=28051, Supplier 1=Digi-Key
T5 T6: library part BD0810J50100AHF, "XFRMR BALUN RF 800-1000MHZ 0805", Frequency Range="800MHz ~ 1GHz", Manufacturer=Anaren, Package / Case="0805 (2012 Metric)", Supplier Part Number 1=1173-1056-2-ND, Category="RF/IF and RFID", ComponentLink1Description=https://cdn.anaren.com/product-documents/Xinger/BalunTransformers/BD0810J50100AHF/BD0810J50100AHF_DataSheet(Rev_E).pdf, ComponentLink1URL=https://cdn.anaren.com/product-documents/Xinger/BalunTransformers/BD0810J50100AHF/BD0810J50100AHF_DataSheet(Rev_E).pdf, Exact Component Match=no, Impedance - Unbalanced/Balanced="50 / 100 Ohm", Insertion Loss (Max)=0.95dB, Manufacturer Part Number=BD0810J50100AHF, Mounting Type="Surface Mount", Packaging="Cut Tape (CT)", Part Status=Active, Phase Difference=1°, Pricing="1=0.6, 10=0.587, 25=0.3928, 50=0.3494, 100=0.3201, 250=0.28724, 500=0.28124 (EUR)", Return Loss (Min)=13dB, RoHs="RoHS Compliant", Stock=9830, Supplier 1=Digi-Key, Supplier Part Number 2=1173-1056-1-ND
U1: "RF Switch IC SP6T 3GHz 50Ohm 14-QFN (2x2)", Manufacturer="Skyworks Solutions", ComponentLink1Description=Datasheet, ComponentLink1URL=https://www.skyworksinc.com/-/media/SkyWorks/Documents/Products/701-800/SKY13416_485LF_201679I.pdf, Manufacturer Part Number=SKY13416-485LF
U2: "699 – 960 MHz 2-stage Power Amplifier", Manufacturer=Qorvo, Supplier Part Number 1=772-TQP9107, Manufacturer Part Number=TQP9107, Pricing="10000=3.63 (USD)", Stock=1110, Supplier 1=Mouser
U3: library part MAX4003EUA+T, "IC LOG AMP RF DETECT 45DB 8-MSOP", Frequency="100MHz ~ 2.5GHz", Manufacturer="Maxim Integrated", Package / Case="8-TSSOP, 8-MSOP (0.118\", 3.00mm Width)", Supplier Device Package=8-uMAX, Supplier Part Number 1=MAX4003EUA+TCT-ND, Voltage - Supply="2.7 V ~ 5 V", Accuracy=-, Category="RF/IF and RFID", ComponentLink1Description=http://datasheets.maximintegrated.com/en/ds/MAX4003.pdf, ComponentLink1URL=http://datasheets.maximintegrated.com/en/ds/MAX4003.pdf, Exact Component Match=no, Input Range="-45dBm ~ 0dBm", Manufacturer Part Number=MAX4003EUA+T, Packaging="Cut Tape (CT)", Part Status=Active, Pricing="1=2.36, 10=2.23, 25=1.7836, 50=1.6944, 100=1.5606, 250=1.48032, 500=1.4268 (EUR)", RF Type="Cellular, TDMA, CDMA, GPRS, GSM", RoHs="RoHS Compliant", Stock=3148, Supplier 1=Digi-Key
U4: library part TXETDCSANF-20.000000, "OSC TCXO 20.0000MHZ CLP SW SMD", Current - Supply (Disable) (Max)=-, Current - Supply (Max)=2mA, Frequency Stability=±2.5ppm, Manufacturer=Taitien, Operating Temperature="-20°C ~ 70°C", Package / Case="4-SMD, No Lead", Supplier Part Number 1=1664-1275-1-ND, Voltage - Supply="2.8 V ~ 3.3 V", Category="Crystals, Oscillators, Resonators", ComponentLink1Description=http://www.taitien.com/wp-content/uploads/2015/12/XO-0076_TX.pdf, ComponentLink1URL=http://www.taitien.com/wp-content/uploads/2015/12/XO-0076_TX.pdf, Function=-, Height - Seated (Max)="0.039\" (1.00mm)", Manufacturer Part Number=TXETDCSANF-20.000000, Mounting Type="Surface Mount", Output="Clipped Sine Wave", Packaging="Cut Tape (CT)", Part Status=Active, Pricing 1="1=1.98, 10=1.932, 50=1.8404, 100=1.6104, 500=1.5644 (EUR)", Ratings=-, RoHs="RoHS Compliant", Size / Dimension="0.126\" L x 0.098\" W (3.20mm x 2.50mm)", Stock=500, Supplier 1=Digi-Key, Type=TCXO
U5: "UHF EPC CLASS1 GEN2 READER", Frequency="860MHz ~ 960MHz", Manufacturer="ST Microelectronics", Manufacturer Part Number=ST25RU3993-BQFT, Operating Temperature=-, Package / Case="48-VFQFN Exposed Pad", Supplier Device Package="48-QFN (7x7)", Supplier Part Number 1=AS3993-BQFTTR-ND, Voltage - Supply="2.7 V ~ 3.6 V", Category="RF/IF and RFID", ComponentLink1Description=http://www.ams.com/eng/content/view/download/78518, ComponentLink1URL=http://www.ams.com/eng/content/view/download/78518, Exact Component Match=yes, Interface=-, Packaging="Tape & Reel (TR)", Part Status=Active, Pricing 1="500=40.10842 (EUR)", RoHs="RoHS Compliant", Standards="EPC, ISO 18000-6", Stock 1=0, Supplier 1=Digi-Key, Type="RFID Reader"
U6 U7 U8: library part PE64906MLAA-Z, "IC RF DTC 100-3000MHZ 10QFN", Frequency="100MHz ~ 3GHz", Frequency - Lower=500MHz, Insertion Loss @ Frequency="0.8dB @ 5.8GHz", Isolation @ Frequency="20dB @ 5.8GHz (typ)", Manufacturer="Peregrine Semiconductor", Operating Temperature="-40°C ~ 85°C", Package / Case="10-UFQFN Exposed Pad", Voltage - Supply="2.5 V ~ 5 V", Category="RF/IF and RFID", Circuit=SPDT, ComponentLink1Description=http://www.psemi.com/pdf/datasheets/pe64906ds.pdf, ComponentLink1URL=http://www.psemi.com/pdf/datasheets/pe64906ds.pdf, ComponentLink2Description=http://www.skyworksinc.com/uploads/documents/SKY13431_374LF_201649C.pdf, ComponentLink2URL=http://www.skyworksinc.com/uploads/documents/SKY13431_374LF_201649C.pdf, Exact Component Match=yes, Features=-, Function="Digitally Tunable Capacitor", IIP3="57dBm (typ)", Impedance="50 Ohm", Manufacturer Part Number=PE64906B-Z, P1dB=36dBm, Packaging="Cut Tape (CT)", RF Type="General Purpose", RoHs="RoHS Compliant", Secondary Attributes="SPI Interface", Topology=-
X3: library part NX3225SA-20.000000MHZ-B2, "CRYSTAL 20.0000MHZ 7.2PF SMD", ESR (Equivalent Series Resistance)="80 Ohm", Frequency=20MHz, Frequency Stability=±15ppm, Frequency Tolerance=±10ppm, Load Capacitance=7.2pF, Manufacturer=NDK, Operating Mode=Fundamental, Operating Temperature="-30°C ~ 85°C", Package / Case="4-SMD, No Lead", Ratings=-, Supplier Part Number 1=644-1098-1-ND, Category="Crystals, Oscillators, Resonators", ComponentLink1Description=http://media.digikey.com/pdf/Data%20Sheets/NDK%20PDFs/NX3225SA-20.000000MHz-B2.pdf, ComponentLink1URL=http://media.digikey.com/pdf/Data%20Sheets/NDK%20PDFs/NX3225SA-20.000000MHz-B2.pdf, Exact Component Match=no, Height - Seated (Max)="0.028\" (0.70mm)", Manufacturer Part Number=NX3225SA-20.000000MHZ-B2, Mounting Type="Surface Mount", Packaging="Cut Tape (CT)", Part Status=Active, Pricing 1="1=0.88, 10=0.779, 50=0.7286, 100=0.6439, 500=0.61002, 1000=0.50836 (EUR)", RoHs="RoHS Compliant", Size / Dimension="0.126\" L x 0.098\" W (3.20mm x 2.50mm)", Stock 1=1453, Supplier 1=Digi-Key, Type="MHz Crystal"

## Via types
v1: diameter 23.62, hole 13.78, Top Layer to Bottom Layer, tented both sides, 16 vias
v2: diameter 25.98, hole 12.99, Top Layer to Bottom Layer, tented both sides, 16 vias
v3: diameter 18, hole 8, Top Layer to Bottom Layer, tented both sides, 4 vias
v4: diameter 19.68, hole 11.81, Top Layer to Bottom Layer, tented both sides, 2 vias

## Nets (pads, with @x,y where several pads share a name; then routed paths per layer and width w, separated by ;. In a path a pad name is that pad's centre, name@x,y a point inside that pad or via, vN(x,y) a via of type N, cw(c..) or ccw(c..) an arc to the next point about the centre after c; other vN are vias at no path point)
ADC: U5.39
AGD: U5.42
ANT_SW_V1: 
ANT_SW_V2: 
ANT_SW_V3: 
CBIB: C88.1 U5.9
CBV: C83.1 U5.8
CD1: U5.41
CD2: U5.40
CLK: U5.37 U6.5 U7.5 U8.5
COMN_A: U5.48
COMN_B: U5.2
COMP_A: U5.47
COMP_B: U5.1
EN: U5.31
ETC_1: U6.6
ETC_2: U7.6
ETC_3: U8.6
GND: C67.2 C69.2 C77.2 C86.2 C88.2 J1.G1 J1.G2 J3.G1 J3.G2 J6.G1 J6.G2 J9.G1 J9.G2 L11.1 L12.1 S1.5 S1.7 T1.1 T1.3 T1.5 T1.7 T2.3 T2.4 T3.2 T3.5 T4.3 T4.4 T5.2 T5.5 T6.2 T6.5 U1.15 U2.3 U2.4 U2.5 U2.6 U2.8 U2.9 U2.10 U2.14 U3.3 U3.5 U4.1 U4.2 U5.5 U5.15 U5.18 U5.19 U5.22 U5.25 U5.49 U6.3 U6.8 U6.9 U6.10 U7.3 U7.10 U8.3 U8.8 U8.9 U8.10 X3.2 X3.4
  other v1: 1990.8,-2090.01 2018.36,-2090.01 2045.91,-2090.01 2073.47,-2090.01 2101.03,-2090.01 1977.02,-2062.45 2004.58,-2062.45 2032.13,-2062.45 2059.69,-2062.45 2087.25,-2062.45 2114.81,-2062.45 1990.8,-2034.89 2018.36,-2034.89 2045.91,-2034.89 2073.47,-2034.89 2101.03,-2034.89
  other v2: 2753.59,-1675.64 2800.83,-1675.64 2848.08,-1675.64 2895.32,-1675.64 2753.59,-1628.39 2800.83,-1628.39 2848.08,-1628.39 2895.32,-1628.39 2753.59,-1581.15 2800.83,-1581.15 2848.08,-1581.15 2895.32,-1581.15 2753.59,-1533.91 2800.83,-1533.91 2848.08,-1533.91 2895.32,-1533.91
  other v3: 1547.6,-1492.06 1622.4,-1492.06 1546,-1405 1623,-1405
  other v4: 1585,-1459.58 1585,-1439.9
IN_N: U5.6
IN_P: U5.4
IRQ: U5.32
LF_CEXT: U5.45
LP_Filter_IN: T1.8
LP_Filter_OUT: T1.4 T2.6
MISO: U5.34
MOSI: U5.35 U6.7 U7.7 U8.7
NCS: U5.33
NetANT1_IN: 
NetANT2_IN: 
NetANT3_IN: 
NetANT4_IN: 
NetANT5_IN: 
NetANT6_IN: 
NetC2_1: U1.3
NetC4_2: L15.1
NetC5_2: L10.2
NetC6_1: L15.2 T3.4
NetC7_2: L10.1 T3.3
NetC8_1: U1.9
NetC9_1: U1.2
NetC10_1: U1.10
NetC11_1: U1.1
NetC13_1: U5.11
NetC16_1: U2.2
NetC17_2: U3.4
NetC21_1: U1.11
NetC32_1: J9.IN
NetC32_2: T3.1
NetC37_1: L11.2 T4.2 U6.1 U6.2 U7.1 U7.2
NetC37_2: 
NetC51_1: U4.3
NetC91_1: 
NetC104_3: 
NetC107_1: J9.OUT
NetC107_2: S1.6
NetC108_1: S1.4
NetC108_2: J6.OUT
NetC109_1: S1.2
NetC110_1: X3.3
NetC111_1: X3.1
NetC112_1: U1.13
NetC112_2: T4.6
NetFB4_2: U4.4
NetJ1_IN: J1.IN T5.1
NetJ1_OUT: J1.OUT U2.13
NetJ3_IN: J3.IN T4.5
NetJ3_OUT: J3.OUT T6.1
NetL12_2: L12.2 U7.8 U7.9 U8.1 U8.2
NetR1_2: U1.7
NetR2_2: U1.6
NetR3_2: U1.5
NetR10_1: U2.11
NetR20_1: U2.12
NetR21_2: U2.1
NetR22_2: T2.2
NetR23_2: U3.1
NetR24_2: T2.5
NetT2_1: T2.1 T4.1
OAD: U5.27
OAD2: U5.26
OSCI: U5.29
OSCO: U5.30
PA_OUT: J6.IN U2.7
PA_SW_V1: S1.1
PA_SW_V2: S1.3
PAOUT_N: L1.1 U5.16 U5.17
PAOUT_P: L2.2 U5.20 U5.21
RF_DETECTOR: U3.7
RFO_N: L4.1 U5.23
RFO_P: L3.2 U5.24
RX_N: T6.3
RX_P: T6.4
TX_N: T5.4
TX_P: T5.3
VBPD: U5.28
VCC_3V3: C69.1 U1.4 U3.2 U3.8 U5.38 U6.4 U7.4 U8.4
VCO: 
VDD_A: U5.44
VDD_B: C77.1 L3.1 L4.2 U5.12
VDD_MIX: C83.2 C86.1 U5.3 U5.7 U5.10
VDD_PA: C67.1 L1.2 L2.1 U5.13
VDDLF: U5.46
VEXT_PA: U5.14
VOSC: U5.43
VPA_4V1: 
VSUP_3V6: 
pads on no net: T1.2 T1.6 T3.6 T5.6 T6.6 U1.8 U1.12 U1.14 U3.6 U5.36

## Keep-outs
Keep-Out Layer:
  the board outline again, w10

## Other copper
Top Layer:
  region net GND: 2463.15,-1905.39 2452.74,-1915.8 2451.1,-1915.8 2448.01,-1912.71 2457.27,-1903.45 2461.21,-1903.45
  pour cut-out: 1902.76,-1089.95 1901.77,-1206.28 2004.84,-1206.32 2005.24,-1090.05
  region net GND: 1946.11,-2151.05 1946.11,-2154.97 1961.27,-2154.97 1961.27,-2151.05
  pour cut-out: 1899.93,-1698.3 1900.92,-1581.97 1797.85,-1581.93 1797.45,-1698.2
  region net GND: 2145.72,-2101.41 2145.72,-2097.88 2129.58,-2097.88 2129.58,-2101.41
  region net GND: 2145.72,-2101.58 2145.72,-2098.05 2129.58,-2098.05 2129.58,-2101.58
  pour cut-out: 1506.49,-1916.84 1622.83,-1917.83 1622.87,-1814.76 1506.59,-1814.36
  region net GND: 1946.11,-2101.41 1946.11,-2097.88 1962.25,-2097.88 1962.25,-2101.41
  region net GND: 2453.39,-2001.43 2431.74,-2023.08 2446.5,-2037.84 2450.44,-2037.84 2468.64,-2019.64 2468.64,-2016.25
  region net GND: 2357.36,-2011.18 2369.08,-1999.46 2367.79,-1996.87 2365.47,-1995.24 2355.42,-2005.29 2355.42,-2009.24
  region net GND: 2392.46,-2046.28 2404.18,-2034.56 2404.18,-2033.95 2408.4,-2038.17 2398.35,-2048.22 2394.4,-2048.22
  region net GND: 2499.49,-1939.25 2486.86,-1951.88 2486.86,-1952.21 2487.24,-1952.21 2488.82,-1953.79 2500.18,-1942.43
  region net GND: 2408.13,-1912.84 2423.87,-1928.58 2423.87,-1929.57 2381.54,-1971.9 2380.56,-1971.9 2363.83,-1955.17 2363.83,-1953.2 2404.18,-1912.84
  pour cut-out: 2346.07,-1974.78 2427.38,-2057.48 2509.9,-1975.03 2428.23,-1892.79

## Silkscreen, mask and mechanical layers (free items; w line width, h text height)
Top Overlay:
  drawing of 19 lines, arcs and shapes, not listed
  text "ST25RU3993 RF Module" at 1661,-2674 h60
  text "Rev: F" at 2067,-2770 h60
Bottom Solder:
  region: 2937.65,-1491.58 2711.27,-1491.58 2711.27,-1717.96 2937.65,-1717.96
  region: 2238.83,-1922.68 1853,-1922.68 1853,-2198.28 2238.83,-2198.28
Board Outline:
  the board outline again, w10
Top Assembly:
  text "(ASSY) SHEET 1 OF 2" at 14145.5,-7225.5 h100
M16_SheetSym:
  lines w5: -4283,3874 -3983,3874 ; -948,-7376 -948,-7076 ; -948,7324 -948,7624 ; 2382,-7376 2382,-7076 ; 2382,7324 2382,7624 ; 5717,-7376 5717,-7076 ; 5717,7324 5717,7624 ; 9047,-7376 9047,-7076 ; 9047,6224 15417,6224 ; 9047,6524 15417,6524 ; 9047,6824 15417,6824 ; 9047,7024 15417,7024 ; 9047,7624 9047,7324 9047,5924 15417,5924 ; 9517,-7076 10917,-7076 ; 9547,5924 9547,7324 ; 10247,5924 10247,7324 ; 10692,-6851 12417,-6851 ; 10692,-6626 12417,-6626 ; 10692,-6376 12417,-6376 ; 10692,-6101 12417,-6101 ; 12382,-7376 12382,-7076 ; 12382,7324 12382,7624 ; 12417,-7076 12417,-6476 ; 12417,-6776 15417,-6776 ; 13223,5924 13223,7321.5 ; 14447,5924 14447,7324 ; 14517,-7076 14517,-6476 ; 15417,-6476 12417,-6476 ; 15417,-3626 15717,-3626 ; 15417,124 15717,124 ; 15417,3874 15717,3874 ; 12417,-6476 12417,-5876 ; 12417,-5876 10692,-5876 10692,-7076 15417,-7076 ; 12417,-5876 15417,-5876 15417,-7076 ; 15417,-7076 15417,7324 -3983,7324 -3983,-7076 15417,-7076 ; -4283,-7376 15717,-7376 15717,7624 -4283,7624 -4283,-7376
  text "1" at -2631.66,7439 h125
  text "2" at 694,7439 h125
  text "3" at 4024,7439 h125
  text "4" at 7359,7439 h125
  text "5" at 10684,7439 h125
  text "6" at 14019,7439 h125
  text "REVISIONS" at 11660.5,7110.5 h125
  text "ZONE" at 9079.5,6866.5 h125
  text "LETTER" at 9612.5,6866.5 h125
  text "DATE" at 13624.5,6866.5 h125
  text "APPROVED" at 14501.5,6867 h125
  text "DESCRIPTION" at 10290.5,6866 h125
  text "REDESIGN BASED ON EVAL BOARD" at 10342,6624 h100
  text "NA" at 9212,6614 h125
  text "E" at 9864.12,6614 h100
  text "PDC" at 14778.12,6614 h100
  text "02/07/2022" at 13335,6611 h100
  text "DESIGN CLEANUP" at 10352,6315 h100
  text "F" at 9859,6308 h100
  text "NA" at 9222,6305 h125
  text "PDC" at 14788.12,6305 h100
  text "04/11/2022" at 13345,6302 h100
  text "A" at -4153,5661 h125
  text "A" at 15547,5661 h125
  text "B" at 15547,1911 h125
  text "C" at 15547,-1839 h125
  text "template rev: 2.4" at 15477,-3576 h40 r90
  text "D" at -4153,-5589 h125
  text "D" at 15547,-5589 h125
  text "DATE:" at 11717,-5967.5 h75
  text "ENGINEER:" at 10715,-5973 h75
  text "ST25RU3993 RF Module" at 13011.5,-6049.5 h125
  text "TITLE:" at 12473,-6056.5 h125
  text "02/07/2022" at 11711.13,-6065.27 h75
  text "Patrick Carberry" at 10761.13,-6066.27 h75
  text "DATE:" at 11717,-6192.5 h75
  text "PCB DESIGNER:" at 10712,-6197.5 h75
  text "Patrick Carberry" at 10761.13,-6315.27 h75
  text "02/07/2022" at 11714.13,-6322.27 h75
  text ".Plot_File_Name" at 12487,-6329 h80
  text "DATE:" at 11717,-6467.5 h75
  text "ISSUED BY:" at 10715,-6474.5 h75
  text "Patrick Carberry" at 10747.63,-6582.77 h75
  text "02/07/2022" at 11700.63,-6589.77 h75
  text "Drawing Size: C" at 12471,-6685.5 h125
  text "REV:" at 14581,-6689 h125
  text "F" at 15071.5,-6689.5 h125
  text "FILE NAME:" at 10717,-6701 h60
  text ".PCB_FILE_NAME_NO_PATH" at 10717,-6799 h60
  text "PRINTED:" at 10717,-6926 h60
  text "SCALE: N/A" at 14557,-6970 h100
  text ".PRINT_DATE" at 10717,-7034 h75
  text "1" at -2631.66,-7261 h125
  text "2" at 694,-7261 h125
  text "3" at 4024,-7261 h125
  text "4" at 7359,-7261 h125
  text "5" at 10684,-7261 h125
  text "6" at 14019,-7261 h125
Drill Drawing:
  drawing of 233 lines, arcs and shapes, not listed
  text "Layer" at 4160.74,-533 h60
  text "Name" at 4570.65,-533 h60
  text "Material" at 5500.4,-533 h60
  text "Thickness" at 6360.16,-533 h60
  text "Constant" at 7010,-533 h60
  text "Board Layer Stack" at 7579.86,-533 h60
  text "Top Overlay" at 4570.65,-653 h60
  text "Top Solder" at 4570.65,-773 h60
  text "Solder Resist" at 5500.4,-773 h60
  text "1.00mil" at 6360.16,-773 h60
  text "4.5" at 7010,-773 h60
  text "1" at 4160.74,-893 h60
  text "Top Layer" at 4570.65,-893 h60
  text "1.70mil" at 6360.16,-893 h60
  text "Dielectric2" at 4570.65,-1013 h60
  text "FR408HR" at 5500.4,-1013 h60
  text "47.00mil" at 6360.16,-1013 h60
  text "3.69" at 7010,-1013 h60
  text "2" at 4160.74,-1133 h60
  text "Bottom Layer" at 4570.65,-1133 h60
  text "1.70mil" at 6360.16,-1133 h60
  text "Bottom Solder" at 4570.65,-1253 h60
  text "Solder Resist" at 5500.4,-1253 h60
  text "1.00mil" at 6360.16,-1253 h60
  text "4.5" at 7010,-1253 h60
  text "Bottom Overlay" at 4570.65,-1373 h60
  text "Symbol" at 4180.7,-2770.5 h72
  text "Count" at 4686.58,-2770.5 h72
  text "Hole Size" at 5226.44,-2770.5 h72
  text "Plated" at 6316.12,-2770.5 h72
  text "Via/Pad" at 6822,-2770.5 h72
  text "2" at 4686.58,-2920.5 h60
  text "11.81mil (0.300mm)" at 5226.44,-2920.5 h60
  text "PTH" at 6316.12,-2920.5 h60
  text "Via" at 6822,-2920.5 h60
  text "4" at 4686.58,-3070.5 h60
  text "8.00mil (0.203mm)" at 5226.44,-3070.5 h60
  text "PTH" at 6316.12,-3070.5 h60
  text "Via" at 6822,-3070.5 h60
  text "16" at 4686.58,-3220.5 h60
  text "12.99mil (0.330mm)" at 5226.44,-3220.5 h60
  text "PTH" at 6316.12,-3220.5 h60
  text "Via" at 6822,-3220.5 h60
  text "16" at 4686.58,-3370.5 h60